# EAGLE board IOB-LED-Monitor_array (EAGLE 7.7.0), part 1 of 2
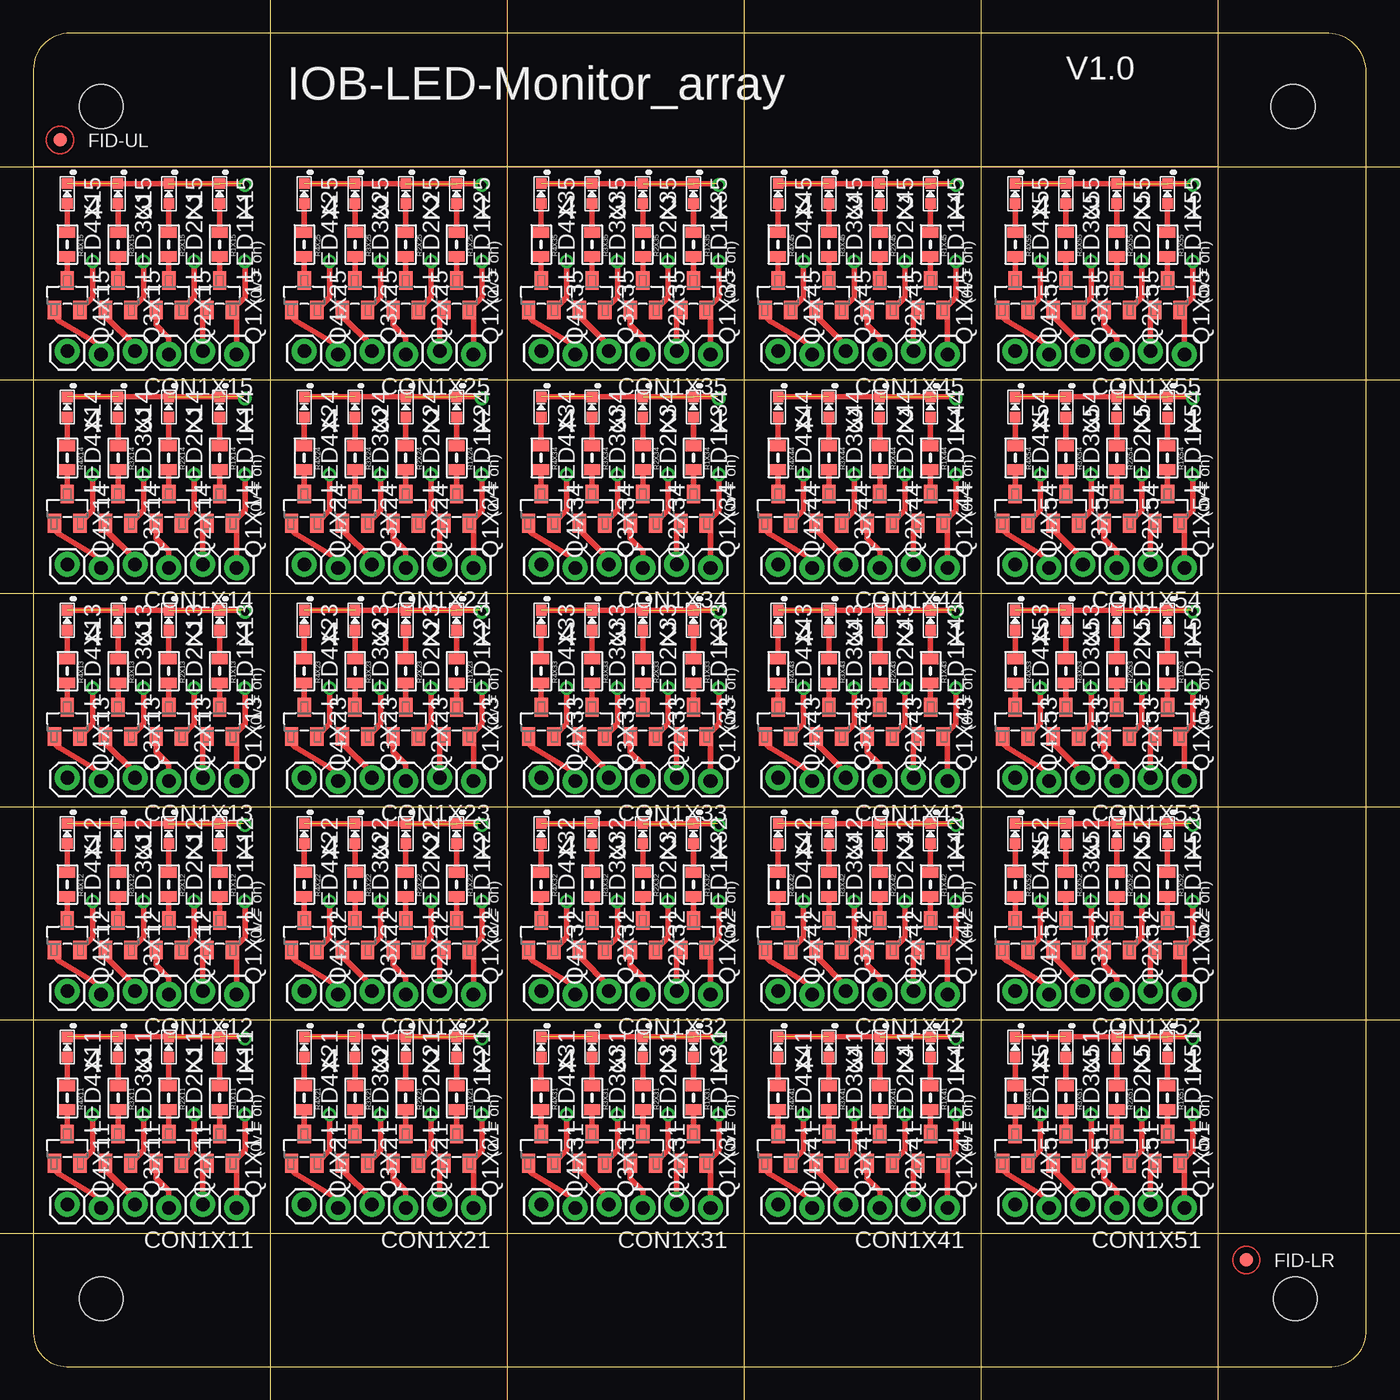
[diagram p0: board, top side]
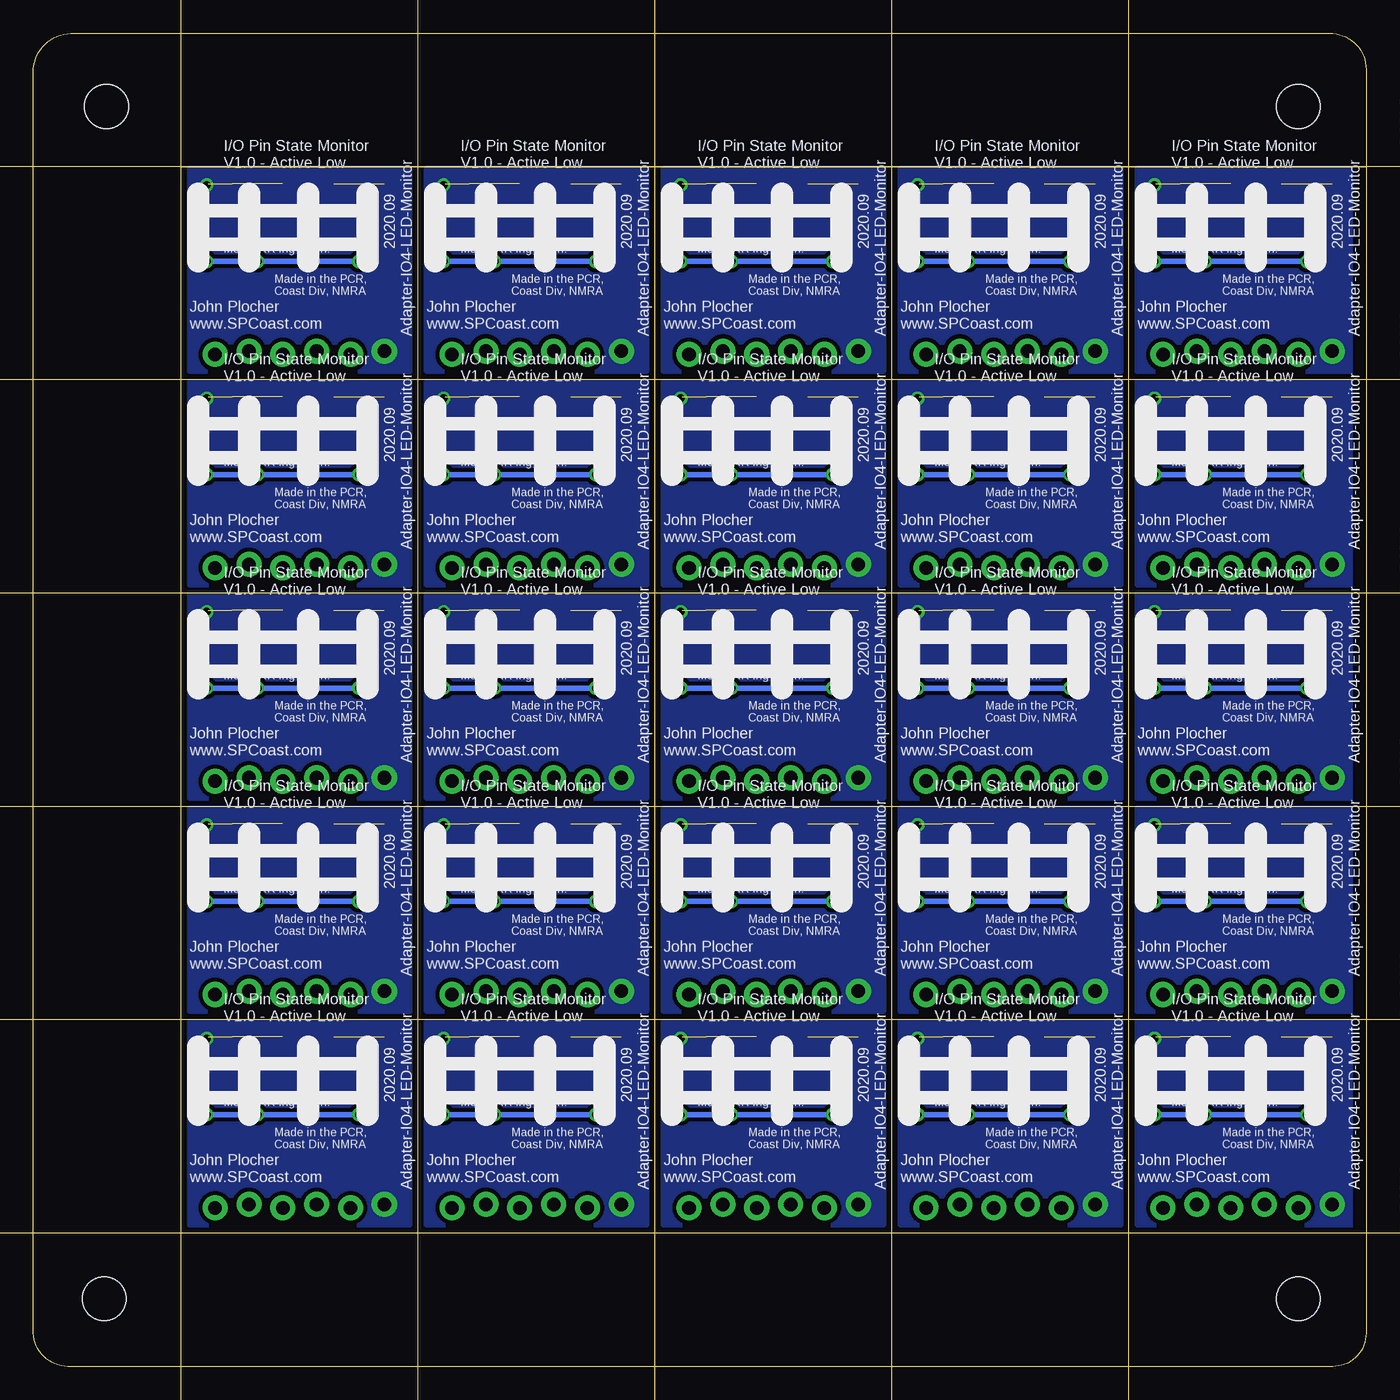
[diagram p1: board, bottom side, seen from below]

Size 100.01 x 100 mm. Coordinates in mm from the lower left corner, seen from the top.
Copper layers (1*16): Top 0.035mm / dielectric 1.5mm / Bottom 0.035mm
Design rules "default": minimum track width 10mil, minimum drill 0.6mm, track to track 8mil, track to pad 8mil, pad to pad 8mil, via to via 8mil, smd to smd 8mil, copper to edge 40mil, drill to drill 8mil, minimum pad ring 10mil, minimum via ring 8mil, stop-mask expansion 4mil, vias tented up to drill 0mil, thermal gap 10mil
Milling: 14 lines

## Footprints (pad centres in the part's own frame; a part is rotated, then mirrored left to right if it is on the bottom)
1X06_LOCK = drill 1.016 pad 1.88: 1 0,0; 2 2.54,-0.254; 3 5.08,0; 4 7.62,-0.254; 5 10.16,0; 6 12.7,-0.254
FIDUCIAL_1MM = smd 1 x 1: 1 0,0
0603-LED = smd 0.8 x 0.8: A 0.75,0; C -0.75,0
SOT23 = smd 1.4 x 1: 1 1.1,-0.95; 2 1.1,0.95; 3 -1.1,0
0805-RES = smd 0.8 x 1.2: 1 -0.9,0; 2 0.9,0
BOARD-SEEED10X10 = hole 3.3: 94.676,5.08; 5.08,94.5; 94.5,94.5; 5.08,5.08

## Placement (x,y rotation side)
CON1X11  [1X06_LOCK]  15.25,11.91 180 top
CON1X12  [1X06_LOCK]  15.25,27.91 180 top
CON1X13  [1X06_LOCK]  15.25,43.91 180 top
CON1X14  [1X06_LOCK]  15.25,59.91 180 top
CON1X15  [1X06_LOCK]  15.25,75.92 180 top
CON1X21  [1X06_LOCK]  33.03,11.91 180 top
CON1X22  [1X06_LOCK]  33.03,27.91 180 top
CON1X23  [1X06_LOCK]  33.03,43.91 180 top
CON1X24  [1X06_LOCK]  33.03,59.91 180 top
CON1X25  [1X06_LOCK]  33.03,75.92 180 top
CON1X31  [1X06_LOCK]  50.81,11.91 180 top
CON1X32  [1X06_LOCK]  50.81,27.91 180 top
CON1X33  [1X06_LOCK]  50.81,43.91 180 top
CON1X34  [1X06_LOCK]  50.81,59.91 180 top
CON1X35  [1X06_LOCK]  50.81,75.92 180 top
CON1X41  [1X06_LOCK]  68.59,11.91 180 top
CON1X42  [1X06_LOCK]  68.59,27.91 180 top
CON1X43  [1X06_LOCK]  68.59,43.91 180 top
CON1X44  [1X06_LOCK]  68.59,59.91 180 top
CON1X45  [1X06_LOCK]  68.59,75.92 180 top
CON1X51  [1X06_LOCK]  86.37,11.91 180 top
CON1X52  [1X06_LOCK]  86.37,27.91 180 top
CON1X53  [1X06_LOCK]  86.37,43.91 180 top
CON1X54  [1X06_LOCK]  86.37,59.91 180 top
CON1X55  [1X06_LOCK]  86.37,75.92 180 top
FID-LR  [FIDUCIAL_1MM]  91.01,8 0 top
FID-UL  [FIDUCIAL_1MM]  2.01,92 0 top
LED1X11  Y  [0603-LED]  13.98,23.97 270 top
LED1X12  Y  [0603-LED]  13.98,39.98 270 top
LED1X13  Y  [0603-LED]  13.98,55.98 270 top
LED1X14  Y  [0603-LED]  13.98,71.98 270 top
LED1X15  Y  [0603-LED]  13.98,87.98 270 top
LED1X21  Y  [0603-LED]  31.76,23.97 270 top
LED1X22  Y  [0603-LED]  31.76,39.98 270 top
LED1X23  Y  [0603-LED]  31.76,55.98 270 top
LED1X24  Y  [0603-LED]  31.76,71.98 270 top
LED1X25  Y  [0603-LED]  31.76,87.98 270 top
LED1X31  Y  [0603-LED]  49.54,23.97 270 top
LED1X32  Y  [0603-LED]  49.54,39.98 270 top
LED1X33  Y  [0603-LED]  49.54,55.98 270 top
LED1X34  Y  [0603-LED]  49.54,71.98 270 top
LED1X35  Y  [0603-LED]  49.54,87.98 270 top
LED1X41  Y  [0603-LED]  67.32,23.97 270 top
LED1X42  Y  [0603-LED]  67.32,39.98 270 top
LED1X43  Y  [0603-LED]  67.32,55.98 270 top
LED1X44  Y  [0603-LED]  67.32,71.98 270 top
LED1X45  Y  [0603-LED]  67.32,87.98 270 top
LED1X51  Y  [0603-LED]  85.1,23.97 270 top
LED1X52  Y  [0603-LED]  85.1,39.98 270 top
LED1X53  Y  [0603-LED]  85.1,55.98 270 top
LED1X54  Y  [0603-LED]  85.1,71.98 270 top
LED1X55  Y  [0603-LED]  85.1,87.98 270 top
LED2X11  Y  [0603-LED]  10.17,23.97 270 top
LED2X12  Y  [0603-LED]  10.17,39.98 270 top
LED2X13  Y  [0603-LED]  10.17,55.98 270 top
LED2X14  Y  [0603-LED]  10.17,71.98 270 top
LED2X15  Y  [0603-LED]  10.17,87.98 270 top
LED2X21  Y  [0603-LED]  27.95,23.97 270 top
LED2X22  Y  [0603-LED]  27.95,39.98 270 top
LED2X23  Y  [0603-LED]  27.95,55.98 270 top
LED2X24  Y  [0603-LED]  27.95,71.98 270 top
LED2X25  Y  [0603-LED]  27.95,87.98 270 top
LED2X31  Y  [0603-LED]  45.73,23.97 270 top
LED2X32  Y  [0603-LED]  45.73,39.98 270 top
LED2X33  Y  [0603-LED]  45.73,55.98 270 top
LED2X34  Y  [0603-LED]  45.73,71.98 270 top
LED2X35  Y  [0603-LED]  45.73,87.98 270 top
LED2X41  Y  [0603-LED]  63.51,23.97 270 top
LED2X42  Y  [0603-LED]  63.51,39.98 270 top
LED2X43  Y  [0603-LED]  63.51,55.98 270 top
LED2X44  Y  [0603-LED]  63.51,71.98 270 top
LED2X45  Y  [0603-LED]  63.51,87.98 270 top
LED2X51  Y  [0603-LED]  81.29,23.97 270 top
LED2X52  Y  [0603-LED]  81.29,39.98 270 top
LED2X53  Y  [0603-LED]  81.29,55.98 270 top
LED2X54  Y  [0603-LED]  81.29,71.98 270 top
LED2X55  Y  [0603-LED]  81.29,87.98 270 top
LED3X11  Y  [0603-LED]  6.36,23.97 270 top
LED3X12  Y  [0603-LED]  6.36,39.98 270 top
LED3X13  Y  [0603-LED]  6.36,55.98 270 top
LED3X14  Y  [0603-LED]  6.36,71.98 270 top
LED3X15  Y  [0603-LED]  6.36,87.98 270 top
LED3X21  Y  [0603-LED]  24.14,23.97 270 top
LED3X22  Y  [0603-LED]  24.14,39.98 270 top
LED3X23  Y  [0603-LED]  24.14,55.98 270 top
LED3X24  Y  [0603-LED]  24.14,71.98 270 top
LED3X25  Y  [0603-LED]  24.14,87.98 270 top
LED3X31  Y  [0603-LED]  41.92,23.97 270 top
LED3X32  Y  [0603-LED]  41.92,39.98 270 top
LED3X33  Y  [0603-LED]  41.92,55.98 270 top
LED3X34  Y  [0603-LED]  41.92,71.98 270 top
LED3X35  Y  [0603-LED]  41.92,87.98 270 top
LED3X41  Y  [0603-LED]  59.7,23.97 270 top
LED3X42  Y  [0603-LED]  59.7,39.98 270 top
LED3X43  Y  [0603-LED]  59.7,55.98 270 top
LED3X44  Y  [0603-LED]  59.7,71.98 270 top
LED3X45  Y  [0603-LED]  59.7,87.98 270 top
LED3X51  Y  [0603-LED]  77.48,23.97 270 top
LED3X52  Y  [0603-LED]  77.48,39.98 270 top
LED3X53  Y  [0603-LED]  77.48,55.98 270 top
LED3X54  Y  [0603-LED]  77.48,71.98 270 top
LED3X55  Y  [0603-LED]  77.48,87.98 270 top
LED4X11  Y  [0603-LED]  2.55,23.97 270 top
LED4X12  Y  [0603-LED]  2.55,39.98 270 top
LED4X13  Y  [0603-LED]  2.55,55.98 270 top
LED4X14  Y  [0603-LED]  2.55,71.98 270 top
LED4X15  Y  [0603-LED]  2.55,87.98 270 top
LED4X21  Y  [0603-LED]  20.33,23.97 270 top
LED4X22  Y  [0603-LED]  20.33,39.98 270 top
LED4X23  Y  [0603-LED]  20.33,55.98 270 top
LED4X24  Y  [0603-LED]  20.33,71.98 270 top
LED4X25  Y  [0603-LED]  20.33,87.98 270 top
LED4X31  Y  [0603-LED]  38.11,23.97 270 top
LED4X32  Y  [0603-LED]  38.11,39.98 270 top
LED4X33  Y  [0603-LED]  38.11,55.98 270 top
LED4X34  Y  [0603-LED]  38.11,71.98 270 top
LED4X35  Y  [0603-LED]  38.11,87.98 270 top
LED4X41  Y  [0603-LED]  55.89,23.97 270 top
LED4X42  Y  [0603-LED]  55.89,39.98 270 top
LED4X43  Y  [0603-LED]  55.89,55.98 270 top
LED4X44  Y  [0603-LED]  55.89,71.98 270 top
LED4X45  Y  [0603-LED]  55.89,87.98 270 top
LED4X51  Y  [0603-LED]  73.67,23.97 270 top
LED4X52  Y  [0603-LED]  73.67,39.98 270 top
LED4X53  Y  [0603-LED]  73.67,55.98 270 top
LED4X54  Y  [0603-LED]  73.67,71.98 270 top
LED4X55  Y  [0603-LED]  73.67,87.98 270 top
Q1X11  P-FET  [SOT23]  13.98,16.35 270 top
Q1X12  P-FET  [SOT23]  13.98,32.36 270 top
Q1X13  P-FET  [SOT23]  13.98,48.36 270 top
Q1X14  P-FET  [SOT23]  13.98,64.36 270 top
Q1X15  P-FET  [SOT23]  13.98,80.36 270 top
Q1X21  P-FET  [SOT23]  31.76,16.35 270 top
Q1X22  P-FET  [SOT23]  31.76,32.36 270 top
Q1X23  P-FET  [SOT23]  31.76,48.36 270 top
Q1X24  P-FET  [SOT23]  31.76,64.36 270 top
Q1X25  P-FET  [SOT23]  31.76,80.36 270 top
Q1X31  P-FET  [SOT23]  49.54,16.35 270 top
Q1X32  P-FET  [SOT23]  49.54,32.36 270 top
Q1X33  P-FET  [SOT23]  49.54,48.36 270 top
Q1X34  P-FET  [SOT23]  49.54,64.36 270 top
Q1X35  P-FET  [SOT23]  49.54,80.36 270 top
Q1X41  P-FET  [SOT23]  67.32,16.35 270 top
Q1X42  P-FET  [SOT23]  67.32,32.36 270 top
Q1X43  P-FET  [SOT23]  67.32,48.36 270 top
Q1X44  P-FET  [SOT23]  67.32,64.36 270 top
Q1X45  P-FET  [SOT23]  67.32,80.36 270 top
Q1X51  P-FET  [SOT23]  85.1,16.35 270 top
Q1X52  P-FET  [SOT23]  85.1,32.36 270 top
Q1X53  P-FET  [SOT23]  85.1,48.36 270 top
Q1X54  P-FET  [SOT23]  85.1,64.36 270 top
Q1X55  P-FET  [SOT23]  85.1,80.36 270 top
Q2X11  P-FET  [SOT23]  10.17,16.35 270 top
Q2X12  P-FET  [SOT23]  10.17,32.36 270 top
Q2X13  P-FET  [SOT23]  10.17,48.36 270 top
Q2X14  P-FET  [SOT23]  10.17,64.36 270 top
Q2X15  P-FET  [SOT23]  10.17,80.36 270 top
Q2X21  P-FET  [SOT23]  27.95,16.35 270 top
Q2X22  P-FET  [SOT23]  27.95,32.36 270 top
Q2X23  P-FET  [SOT23]  27.95,48.36 270 top
Q2X24  P-FET  [SOT23]  27.95,64.36 270 top
Q2X25  P-FET  [SOT23]  27.95,80.36 270 top
Q2X31  P-FET  [SOT23]  45.73,16.35 270 top
Q2X32  P-FET  [SOT23]  45.73,32.36 270 top
Q2X33  P-FET  [SOT23]  45.73,48.36 270 top
Q2X34  P-FET  [SOT23]  45.73,64.36 270 top
Q2X35  P-FET  [SOT23]  45.73,80.36 270 top
Q2X41  P-FET  [SOT23]  63.51,16.35 270 top
Q2X42  P-FET  [SOT23]  63.51,32.36 270 top
Q2X43  P-FET  [SOT23]  63.51,48.36 270 top
Q2X44  P-FET  [SOT23]  63.51,64.36 270 top
Q2X45  P-FET  [SOT23]  63.51,80.36 270 top
Q2X51  P-FET  [SOT23]  81.29,16.35 270 top
Q2X52  P-FET  [SOT23]  81.29,32.36 270 top
Q2X53  P-FET  [SOT23]  81.29,48.36 270 top
Q2X54  P-FET  [SOT23]  81.29,64.36 270 top
Q2X55  P-FET  [SOT23]  81.29,80.36 270 top
Q3X11  P-FET  [SOT23]  6.36,16.35 270 top
Q3X12  P-FET  [SOT23]  6.36,32.36 270 top
Q3X13  P-FET  [SOT23]  6.36,48.36 270 top
Q3X14  P-FET  [SOT23]  6.36,64.36 270 top
Q3X15  P-FET  [SOT23]  6.36,80.36 270 top
Q3X21  P-FET  [SOT23]  24.14,16.35 270 top
Q3X22  P-FET  [SOT23]  24.14,32.36 270 top
Q3X23  P-FET  [SOT23]  24.14,48.36 270 top
Q3X24  P-FET  [SOT23]  24.14,64.36 270 top
Q3X25  P-FET  [SOT23]  24.14,80.36 270 top
Q3X31  P-FET  [SOT23]  41.92,16.35 270 top
Q3X32  P-FET  [SOT23]  41.92,32.36 270 top
Q3X33  P-FET  [SOT23]  41.92,48.36 270 top
Q3X34  P-FET  [SOT23]  41.92,64.36 270 top
Q3X35  P-FET  [SOT23]  41.92,80.36 270 top
Q3X41  P-FET  [SOT23]  59.7,16.35 270 top
Q3X42  P-FET  [SOT23]  59.7,32.36 270 top
Q3X43  P-FET  [SOT23]  59.7,48.36 270 top
Q3X44  P-FET  [SOT23]  59.7,64.36 270 top
Q3X45  P-FET  [SOT23]  59.7,80.36 270 top
Q3X51  P-FET  [SOT23]  77.48,16.35 270 top
Q3X52  P-FET  [SOT23]  77.48,32.36 270 top
Q3X53  P-FET  [SOT23]  77.48,48.36 270 top
Q3X54  P-FET  [SOT23]  77.48,64.36 270 top
Q3X55  P-FET  [SOT23]  77.48,80.36 270 top
Q4X11  P-FET  [SOT23]  2.55,16.35 270 top
Q4X12  P-FET  [SOT23]  2.55,32.36 270 top
Q4X13  P-FET  [SOT23]  2.55,48.36 270 top
Q4X14  P-FET  [SOT23]  2.55,64.36 270 top
Q4X15  P-FET  [SOT23]  2.55,80.36 270 top
Q4X21  P-FET  [SOT23]  20.33,16.35 270 top
Q4X22  P-FET  [SOT23]  20.33,32.36 270 top
Q4X23  P-FET  [SOT23]  20.33,48.36 270 top
Q4X24  P-FET  [SOT23]  20.33,64.36 270 top
Q4X25  P-FET  [SOT23]  20.33,80.36 270 top
Q4X31  P-FET  [SOT23]  38.11,16.35 270 top
Q4X32  P-FET  [SOT23]  38.11,32.36 270 top
Q4X33  P-FET  [SOT23]  38.11,48.36 270 top
Q4X34  P-FET  [SOT23]  38.11,64.36 270 top
Q4X35  P-FET  [SOT23]  38.11,80.36 270 top
Q4X41  P-FET  [SOT23]  55.89,16.35 270 top
Q4X42  P-FET  [SOT23]  55.89,32.36 270 top
Q4X43  P-FET  [SOT23]  55.89,48.36 270 top
Q4X44  P-FET  [SOT23]  55.89,64.36 270 top
Q4X45  P-FET  [SOT23]  55.89,80.36 270 top
Q4X51  P-FET  [SOT23]  73.67,16.35 270 top
Q4X52  P-FET  [SOT23]  73.67,32.36 270 top
Q4X53  P-FET  [SOT23]  73.67,48.36 270 top
Q4X54  P-FET  [SOT23]  73.67,64.36 270 top
Q4X55  P-FET  [SOT23]  73.67,80.36 270 top
R1X11  2K0  [0805-RES]  13.98,20.16 270 top
R1X12  2K0  [0805-RES]  13.98,36.17 270 top
R1X13  2K0  [0805-RES]  13.98,52.17 270 top
R1X14  2K0  [0805-RES]  13.98,68.17 270 top
R1X15  2K0  [0805-RES]  13.98,84.17 270 top
R1X21  2K0  [0805-RES]  31.76,20.16 270 top
R1X22  2K0  [0805-RES]  31.76,36.17 270 top
R1X23  2K0  [0805-RES]  31.76,52.17 270 top
R1X24  2K0  [0805-RES]  31.76,68.17 270 top
R1X25  2K0  [0805-RES]  31.76,84.17 270 top
R1X31  2K0  [0805-RES]  49.54,20.16 270 top
R1X32  2K0  [0805-RES]  49.54,36.17 270 top
R1X33  2K0  [0805-RES]  49.54,52.17 270 top
R1X34  2K0  [0805-RES]  49.54,68.17 270 top
R1X35  2K0  [0805-RES]  49.54,84.17 270 top
R1X41  2K0  [0805-RES]  67.32,20.16 270 top
R1X42  2K0  [0805-RES]  67.32,36.17 270 top
R1X43  2K0  [0805-RES]  67.32,52.17 270 top
R1X44  2K0  [0805-RES]  67.32,68.17 270 top
R1X45  2K0  [0805-RES]  67.32,84.17 270 top
R1X51  2K0  [0805-RES]  85.1,20.16 270 top
R1X52  2K0  [0805-RES]  85.1,36.17 270 top
R1X53  2K0  [0805-RES]  85.1,52.17 270 top
R1X54  2K0  [0805-RES]  85.1,68.17 270 top
R1X55  2K0  [0805-RES]  85.1,84.17 270 top
R2X11  2K0  [0805-RES]  10.17,20.16 270 top
R2X12  2K0  [0805-RES]  10.17,36.17 270 top
R2X13  2K0  [0805-RES]  10.17,52.17 270 top
R2X14  2K0  [0805-RES]  10.17,68.17 270 top
R2X15  2K0  [0805-RES]  10.17,84.17 270 top
R2X21  2K0  [0805-RES]  27.95,20.16 270 top
R2X22  2K0  [0805-RES]  27.95,36.17 270 top
R2X23  2K0  [0805-RES]  27.95,52.17 270 top
R2X24  2K0  [0805-RES]  27.95,68.17 270 top
R2X25  2K0  [0805-RES]  27.95,84.17 270 top
R2X31  2K0  [0805-RES]  45.73,20.16 270 top
R2X32  2K0  [0805-RES]  45.73,36.17 270 top
R2X33  2K0  [0805-RES]  45.73,52.17 270 top
R2X34  2K0  [0805-RES]  45.73,68.17 270 top
R2X35  2K0  [0805-RES]  45.73,84.17 270 top
R2X41  2K0  [0805-RES]  63.51,20.16 270 top
R2X42  2K0  [0805-RES]  63.51,36.17 270 top
R2X43  2K0  [0805-RES]  63.51,52.17 270 top
R2X44  2K0  [0805-RES]  63.51,68.17 270 top
R2X45  2K0  [0805-RES]  63.51,84.17 270 top
R2X51  2K0  [0805-RES]  81.29,20.16 270 top
R2X52  2K0  [0805-RES]  81.29,36.17 270 top
R2X53  2K0  [0805-RES]  81.29,52.17 270 top
R2X54  2K0  [0805-RES]  81.29,68.17 270 top
R2X55  2K0  [0805-RES]  81.29,84.17 270 top
R3X11  2K0  [0805-RES]  6.36,20.16 270 top
R3X12  2K0  [0805-RES]  6.36,36.17 270 top
R3X13  2K0  [0805-RES]  6.36,52.17 270 top
R3X14  2K0  [0805-RES]  6.36,68.17 270 top
R3X15  2K0  [0805-RES]  6.36,84.17 270 top
R3X21  2K0  [0805-RES]  24.14,20.16 270 top
R3X22  2K0  [0805-RES]  24.14,36.17 270 top
R3X23  2K0  [0805-RES]  24.14,52.17 270 top
R3X24  2K0  [0805-RES]  24.14,68.17 270 top
R3X25  2K0  [0805-RES]  24.14,84.17 270 top
R3X31  2K0  [0805-RES]  41.92,20.16 270 top
R3X32  2K0  [0805-RES]  41.92,36.17 270 top
R3X33  2K0  [0805-RES]  41.92,52.17 270 top
R3X34  2K0  [0805-RES]  41.92,68.17 270 top
R3X35  2K0  [0805-RES]  41.92,84.17 270 top
R3X41  2K0  [0805-RES]  59.7,20.16 270 top
R3X42  2K0  [0805-RES]  59.7,36.17 270 top
R3X43  2K0  [0805-RES]  59.7,52.17 270 top
R3X44  2K0  [0805-RES]  59.7,68.17 270 top
R3X45  2K0  [0805-RES]  59.7,84.17 270 top
R3X51  2K0  [0805-RES]  77.48,20.16 270 top
R3X52  2K0  [0805-RES]  77.48,36.17 270 top
R3X53  2K0  [0805-RES]  77.48,52.17 270 top
R3X54  2K0  [0805-RES]  77.48,68.17 270 top
R3X55  2K0  [0805-RES]  77.48,84.17 270 top
R4X1  [BOARD-SEEED10X10]  0.01,0 0 top
R4X11  2K0  [0805-RES]  2.55,20.16 270 top
R4X12  2K0  [0805-RES]  2.55,36.17 270 top
R4X13  2K0  [0805-RES]  2.55,52.17 270 top
R4X14  2K0  [0805-RES]  2.55,68.17 270 top
R4X15  2K0  [0805-RES]  2.55,84.17 270 top
R4X21  2K0  [0805-RES]  20.33,20.16 270 top
R4X22  2K0  [0805-RES]  20.33,36.17 270 top
R4X23  2K0  [0805-RES]  20.33,52.17 270 top
R4X24  2K0  [0805-RES]  20.33,68.17 270 top
R4X25  2K0  [0805-RES]  20.33,84.17 270 top
R4X31  2K0  [0805-RES]  38.11,20.16 270 top
R4X32  2K0  [0805-RES]  38.11,36.17 270 top
R4X33  2K0  [0805-RES]  38.11,52.17 270 top
R4X34  2K0  [0805-RES]  38.11,68.17 270 top
R4X35  2K0  [0805-RES]  38.11,84.17 270 top
R4X41  2K0  [0805-RES]  55.89,20.16 270 top
R4X42  2K0  [0805-RES]  55.89,36.17 270 top
R4X43  2K0  [0805-RES]  55.89,52.17 270 top
R4X44  2K0  [0805-RES]  55.89,68.17 270 top
R4X45  2K0  [0805-RES]  55.89,84.17 270 top
R4X51  2K0  [0805-RES]  73.67,20.16 270 top
R4X52  2K0  [0805-RES]  73.67,36.17 270 top
R4X53  2K0  [0805-RES]  73.67,52.17 270 top
R4X54  2K0  [0805-RES]  73.67,68.17 270 top
R4X55  2K0  [0805-RES]  73.67,84.17 270 top

## Library data of the parts
CON1X11-CON1X15 CON1X21-CON1X25 CON1X31-CON1X35 CON1X41-CON1X45 CON1X51-CON1X55 FID-LR FID-UL LED1X11-LED1X15 LED1X21-LED1X25 LED1X31-LED1X35 LED1X41-LED1X45 LED1X51-LED1X55 LED2X11-LED2X15 LED2X21-LED2X25 LED2X31-LED2X35 LED2X41-LED2X45 LED2X51-LED2X55 LED3X11-LED3X15 LED3X21-LED3X25 LED3X31-LED3X35 LED3X41-LED3X45 LED3X51-LED3X55 LED4X11-LED4X15 LED4X21-LED4X25 LED4X31-LED4X35 LED4X41-LED4X45 LED4X51-LED4X55 Q1X11-Q1X15 Q1X21-Q1X25 Q1X31-Q1X35 Q1X41-Q1X45 Q1X51-Q1X55 Q2X11-Q2X15 Q2X21-Q2X25 Q2X31-Q2X35 Q2X41-Q2X45 Q2X51-Q2X55 Q3X11-Q3X15 Q3X21-Q3X25 Q3X31-Q3X35 Q3X41-Q3X45 Q3X51-Q3X55 Q4X11-Q4X15 Q4X21-Q4X25 Q4X31-Q4X35 Q4X41-Q4X45 Q4X51-Q4X55 R1X11-R1X15 R1X21-R1X25 R1X31-R1X35 R1X41-R1X45 R1X51-R1X55 R2X11-R2X15 R2X21-R2X25 R2X31-R2X35 R2X41-R2X45 R2X51-R2X55 R3X11-R3X15 R3X21-R3X25 R3X31-R3X35 R3X41-R3X45 R3X51-R3X55 R4X1 R4X11-R4X15 R4X21-R4X25 R4X31-R4X35 R4X41-R4X45 R4X51-R4X55 = SPCoast

## Nets
GNDX11: CON1X11.6 LED1X11.C LED2X11.C LED3X11.C LED4X11.C
GNDX12: CON1X12.6 LED1X12.C LED2X12.C LED3X12.C LED4X12.C
GNDX13: CON1X13.6 LED1X13.C LED2X13.C LED3X13.C LED4X13.C
GNDX14: CON1X14.6 LED1X14.C LED2X14.C LED3X14.C LED4X14.C
GNDX15: CON1X15.6 LED1X15.C LED2X15.C LED3X15.C LED4X15.C
GNDX21: CON1X21.6 LED1X21.C LED2X21.C LED3X21.C LED4X21.C
GNDX22: CON1X22.6 LED1X22.C LED2X22.C LED3X22.C LED4X22.C
GNDX23: CON1X23.6 LED1X23.C LED2X23.C LED3X23.C LED4X23.C
GNDX24: CON1X24.6 LED1X24.C LED2X24.C LED3X24.C LED4X24.C
GNDX25: CON1X25.6 LED1X25.C LED2X25.C LED3X25.C LED4X25.C
GNDX31: CON1X31.6 LED1X31.C LED2X31.C LED3X31.C LED4X31.C
GNDX32: CON1X32.6 LED1X32.C LED2X32.C LED3X32.C LED4X32.C
GNDX33: CON1X33.6 LED1X33.C LED2X33.C LED3X33.C LED4X33.C
GNDX34: CON1X34.6 LED1X34.C LED2X34.C LED3X34.C LED4X34.C
GNDX35: CON1X35.6 LED1X35.C LED2X35.C LED3X35.C LED4X35.C
GNDX41: CON1X41.6 LED1X41.C LED2X41.C LED3X41.C LED4X41.C
GNDX42: CON1X42.6 LED1X42.C LED2X42.C LED3X42.C LED4X42.C
GNDX43: CON1X43.6 LED1X43.C LED2X43.C LED3X43.C LED4X43.C
GNDX44: CON1X44.6 LED1X44.C LED2X44.C LED3X44.C LED4X44.C
GNDX45: CON1X45.6 LED1X45.C LED2X45.C LED3X45.C LED4X45.C
GNDX51: CON1X51.6 LED1X51.C LED2X51.C LED3X51.C LED4X51.C
GNDX52: CON1X52.6 LED1X52.C LED2X52.C LED3X52.C LED4X52.C
GNDX53: CON1X53.6 LED1X53.C LED2X53.C LED3X53.C LED4X53.C
GNDX54: CON1X54.6 LED1X54.C LED2X54.C LED3X54.C LED4X54.C
GNDX55: CON1X55.6 LED1X55.C LED2X55.C LED3X55.C LED4X55.C
N$44X11: Q1X11.3 R1X11.2
N$44X12: Q1X12.3 R1X12.2
N$44X13: Q1X13.3 R1X13.2
N$44X14: Q1X14.3 R1X14.2
N$44X15: Q1X15.3 R1X15.2
N$44X21: Q1X21.3 R1X21.2
N$44X22: Q1X22.3 R1X22.2
N$44X23: Q1X23.3 R1X23.2
N$44X24: Q1X24.3 R1X24.2
N$44X25: Q1X25.3 R1X25.2
N$44X31: Q1X31.3 R1X31.2
N$44X32: Q1X32.3 R1X32.2
N$44X33: Q1X33.3 R1X33.2
N$44X34: Q1X34.3 R1X34.2
N$44X35: Q1X35.3 R1X35.2
N$44X41: Q1X41.3 R1X41.2
N$44X42: Q1X42.3 R1X42.2
N$44X43: Q1X43.3 R1X43.2
N$44X44: Q1X44.3 R1X44.2
N$44X45: Q1X45.3 R1X45.2
N$44X51: Q1X51.3 R1X51.2
N$44X52: Q1X52.3 R1X52.2
N$44X53: Q1X53.3 R1X53.2
N$44X54: Q1X54.3 R1X54.2
N$44X55: Q1X55.3 R1X55.2
N$45X11: Q2X11.3 R2X11.2
N$45X12: Q2X12.3 R2X12.2
N$45X13: Q2X13.3 R2X13.2
N$45X14: Q2X14.3 R2X14.2
N$45X15: Q2X15.3 R2X15.2
N$45X21: Q2X21.3 R2X21.2
N$45X22: Q2X22.3 R2X22.2
N$45X23: Q2X23.3 R2X23.2
N$45X24: Q2X24.3 R2X24.2
N$45X25: Q2X25.3 R2X25.2
N$45X31: Q2X31.3 R2X31.2
N$45X32: Q2X32.3 R2X32.2
N$45X33: Q2X33.3 R2X33.2
N$45X34: Q2X34.3 R2X34.2
N$45X35: Q2X35.3 R2X35.2
N$45X41: Q2X41.3 R2X41.2
N$45X42: Q2X42.3 R2X42.2
N$45X43: Q2X43.3 R2X43.2
N$45X44: Q2X44.3 R2X44.2
N$45X45: Q2X45.3 R2X45.2
N$45X51: Q2X51.3 R2X51.2
N$45X52: Q2X52.3 R2X52.2
N$45X53: Q2X53.3 R2X53.2
N$45X54: Q2X54.3 R2X54.2
N$45X55: Q2X55.3 R2X55.2
N$46X11: Q3X11.3 R3X11.2
N$46X12: Q3X12.3 R3X12.2
N$46X13: Q3X13.3 R3X13.2
N$46X14: Q3X14.3 R3X14.2
N$46X15: Q3X15.3 R3X15.2
N$46X21: Q3X21.3 R3X21.2
N$46X22: Q3X22.3 R3X22.2
N$46X23: Q3X23.3 R3X23.2
N$46X24: Q3X24.3 R3X24.2
N$46X25: Q3X25.3 R3X25.2
N$46X31: Q3X31.3 R3X31.2
N$46X32: Q3X32.3 R3X32.2
N$46X33: Q3X33.3 R3X33.2
N$46X34: Q3X34.3 R3X34.2
N$46X35: Q3X35.3 R3X35.2
N$46X41: Q3X41.3 R3X41.2
N$46X42: Q3X42.3 R3X42.2
N$46X43: Q3X43.3 R3X43.2
N$46X44: Q3X44.3 R3X44.2
N$46X45: Q3X45.3 R3X45.2
N$46X51: Q3X51.3 R3X51.2
N$46X52: Q3X52.3 R3X52.2
N$46X53: Q3X53.3 R3X53.2
N$46X54: Q3X54.3 R3X54.2
N$46X55: Q3X55.3 R3X55.2
N$47X11: Q4X11.3 R4X11.2
N$47X12: Q4X12.3 R4X12.2
N$47X13: Q4X13.3 R4X13.2
N$47X14: Q4X14.3 R4X14.2
N$47X15: Q4X15.3 R4X15.2
N$47X21: Q4X21.3 R4X21.2
N$47X22: Q4X22.3 R4X22.2
N$47X23: Q4X23.3 R4X23.2
N$47X24: Q4X24.3 R4X24.2
N$47X25: Q4X25.3 R4X25.2
N$47X31: Q4X31.3 R4X31.2
N$47X32: Q4X32.3 R4X32.2
N$47X33: Q4X33.3 R4X33.2
N$47X34: Q4X34.3 R4X34.2
N$47X35: Q4X35.3 R4X35.2
N$47X41: Q4X41.3 R4X41.2
N$47X42: Q4X42.3 R4X42.2
N$47X43: Q4X43.3 R4X43.2
N$47X44: Q4X44.3 R4X44.2
N$47X45: Q4X45.3 R4X45.2
N$47X51: Q4X51.3 R4X51.2
N$47X52: Q4X52.3 R4X52.2
N$47X53: Q4X53.3 R4X53.2
N$47X54: Q4X54.3 R4X54.2
N$47X55: Q4X55.3 R4X55.2
N$48X11: LED1X11.A R1X11.1
N$48X12: LED1X12.A R1X12.1
N$48X13: LED1X13.A R1X13.1
N$48X14: LED1X14.A R1X14.1
N$48X15: LED1X15.A R1X15.1
N$48X21: LED1X21.A R1X21.1
N$48X22: LED1X22.A R1X22.1
N$48X23: LED1X23.A R1X23.1
N$48X24: LED1X24.A R1X24.1
N$48X25: LED1X25.A R1X25.1
N$48X31: LED1X31.A R1X31.1
N$48X32: LED1X32.A R1X32.1
N$48X33: LED1X33.A R1X33.1
N$48X34: LED1X34.A R1X34.1
N$48X35: LED1X35.A R1X35.1
N$48X41: LED1X41.A R1X41.1
N$48X42: LED1X42.A R1X42.1
N$48X43: LED1X43.A R1X43.1
N$48X44: LED1X44.A R1X44.1
N$48X45: LED1X45.A R1X45.1
N$48X51: LED1X51.A R1X51.1
N$48X52: LED1X52.A R1X52.1
N$48X53: LED1X53.A R1X53.1
N$48X54: LED1X54.A R1X54.1
N$48X55: LED1X55.A R1X55.1
N$49X11: LED2X11.A R2X11.1
N$49X12: LED2X12.A R2X12.1
N$49X13: LED2X13.A R2X13.1
N$49X14: LED2X14.A R2X14.1
N$49X15: LED2X15.A R2X15.1
N$49X21: LED2X21.A R2X21.1
N$49X22: LED2X22.A R2X22.1
N$49X23: LED2X23.A R2X23.1
N$49X24: LED2X24.A R2X24.1
N$49X25: LED2X25.A R2X25.1
N$49X31: LED2X31.A R2X31.1
N$49X32: LED2X32.A R2X32.1
N$49X33: LED2X33.A R2X33.1
N$49X34: LED2X34.A R2X34.1
N$49X35: LED2X35.A R2X35.1
N$49X41: LED2X41.A R2X41.1
N$49X42: LED2X42.A R2X42.1
N$49X43: LED2X43.A R2X43.1
N$49X44: LED2X44.A R2X44.1
N$49X45: LED2X45.A R2X45.1
N$49X51: LED2X51.A R2X51.1
N$49X52: LED2X52.A R2X52.1
N$49X53: LED2X53.A R2X53.1
N$49X54: LED2X54.A R2X54.1
N$49X55: LED2X55.A R2X55.1
N$50X11: LED3X11.A R3X11.1
N$50X12: LED3X12.A R3X12.1
N$50X13: LED3X13.A R3X13.1
N$50X14: LED3X14.A R3X14.1
N$50X15: LED3X15.A R3X15.1
N$50X21: LED3X21.A R3X21.1
N$50X22: LED3X22.A R3X22.1
N$50X23: LED3X23.A R3X23.1
N$50X24: LED3X24.A R3X24.1
N$50X25: LED3X25.A R3X25.1
N$50X31: LED3X31.A R3X31.1
N$50X32: LED3X32.A R3X32.1
N$50X33: LED3X33.A R3X33.1
N$50X34: LED3X34.A R3X34.1
N$50X35: LED3X35.A R3X35.1
N$50X41: LED3X41.A R3X41.1
N$50X42: LED3X42.A R3X42.1
N$50X43: LED3X43.A R3X43.1
N$50X44: LED3X44.A R3X44.1
N$50X45: LED3X45.A R3X45.1
N$50X51: LED3X51.A R3X51.1
N$50X52: LED3X52.A R3X52.1
N$50X53: LED3X53.A R3X53.1
N$50X54: LED3X54.A R3X54.1
N$50X55: LED3X55.A R3X55.1
N$51X11: LED4X11.A R4X11.1
N$51X12: LED4X12.A R4X12.1
N$51X13: LED4X13.A R4X13.1
N$51X14: LED4X14.A R4X14.1
N$51X15: LED4X15.A R4X15.1
N$51X21: LED4X21.A R4X21.1
N$51X22: LED4X22.A R4X22.1
N$51X23: LED4X23.A R4X23.1
N$51X24: LED4X24.A R4X24.1
N$51X25: LED4X25.A R4X25.1
N$51X31: LED4X31.A R4X31.1
N$51X32: LED4X32.A R4X32.1
N$51X33: LED4X33.A R4X33.1
N$51X34: LED4X34.A R4X34.1
N$51X35: LED4X35.A R4X35.1
N$51X41: LED4X41.A R4X41.1
N$51X42: LED4X42.A R4X42.1
N$51X43: LED4X43.A R4X43.1
N$51X44: LED4X44.A R4X44.1
N$51X45: LED4X45.A R4X45.1
N$51X51: LED4X51.A R4X51.1
N$51X52: LED4X52.A R4X52.1
N$51X53: LED4X53.A R4X53.1
N$51X54: LED4X54.A R4X54.1
N$51X55: LED4X55.A R4X55.1
P1X11: CON1X11.2 Q1X11.1
P1X12: CON1X12.2 Q1X12.1
P1X13: CON1X13.2 Q1X13.1
P1X14: CON1X14.2 Q1X14.1
P1X15: CON1X15.2 Q1X15.1
P1X21: CON1X21.2 Q1X21.1
P1X22: CON1X22.2 Q1X22.1
P1X23: CON1X23.2 Q1X23.1
P1X24: CON1X24.2 Q1X24.1
P1X25: CON1X25.2 Q1X25.1
P1X31: CON1X31.2 Q1X31.1
P1X32: CON1X32.2 Q1X32.1
P1X33: CON1X33.2 Q1X33.1
P1X34: CON1X34.2 Q1X34.1
P1X35: CON1X35.2 Q1X35.1
P1X41: CON1X41.2 Q1X41.1
P1X42: CON1X42.2 Q1X42.1
P1X43: CON1X43.2 Q1X43.1
P1X44: CON1X44.2 Q1X44.1
P1X45: CON1X45.2 Q1X45.1
P1X51: CON1X51.2 Q1X51.1
P1X52: CON1X52.2 Q1X52.1
P1X53: CON1X53.2 Q1X53.1
P1X54: CON1X54.2 Q1X54.1
P1X55: CON1X55.2 Q1X55.1
P2X11: CON1X11.3 Q2X11.1
P2X12: CON1X12.3 Q2X12.1
P2X13: CON1X13.3 Q2X13.1
P2X14: CON1X14.3 Q2X14.1
P2X15: CON1X15.3 Q2X15.1
P2X21: CON1X21.3 Q2X21.1
P2X22: CON1X22.3 Q2X22.1
P2X23: CON1X23.3 Q2X23.1
P2X24: CON1X24.3 Q2X24.1
P2X25: CON1X25.3 Q2X25.1
P2X31: CON1X31.3 Q2X31.1
P2X32: CON1X32.3 Q2X32.1
P2X33: CON1X33.3 Q2X33.1
P2X34: CON1X34.3 Q2X34.1
P2X35: CON1X35.3 Q2X35.1
P2X41: CON1X41.3 Q2X41.1
P2X42: CON1X42.3 Q2X42.1
P2X43: CON1X43.3 Q2X43.1
P2X44: CON1X44.3 Q2X44.1
P2X45: CON1X45.3 Q2X45.1
P2X51: CON1X51.3 Q2X51.1
P2X52: CON1X52.3 Q2X52.1
P2X53: CON1X53.3 Q2X53.1
P2X54: CON1X54.3 Q2X54.1
P2X55: CON1X55.3 Q2X55.1
P3X11: CON1X11.4 Q3X11.1
P3X12: CON1X12.4 Q3X12.1
P3X13: CON1X13.4 Q3X13.1
P3X14: CON1X14.4 Q3X14.1
P3X15: CON1X15.4 Q3X15.1
P3X21: CON1X21.4 Q3X21.1
P3X22: CON1X22.4 Q3X22.1
P3X23: CON1X23.4 Q3X23.1
P3X24: CON1X24.4 Q3X24.1
P3X25: CON1X25.4 Q3X25.1
P3X31: CON1X31.4 Q3X31.1
P3X32: CON1X32.4 Q3X32.1
P3X33: CON1X33.4 Q3X33.1
P3X34: CON1X34.4 Q3X34.1
P3X35: CON1X35.4 Q3X35.1
P3X41: CON1X41.4 Q3X41.1
P3X42: CON1X42.4 Q3X42.1
P3X43: CON1X43.4 Q3X43.1
P3X44: CON1X44.4 Q3X44.1
P3X45: CON1X45.4 Q3X45.1
P3X51: CON1X51.4 Q3X51.1
P3X52: CON1X52.4 Q3X52.1
P3X53: CON1X53.4 Q3X53.1
P3X54: CON1X54.4 Q3X54.1
P3X55: CON1X55.4 Q3X55.1
P4X11: CON1X11.5 Q4X11.1
P4X12: CON1X12.5 Q4X12.1
P4X13: CON1X13.5 Q4X13.1
P4X14: CON1X14.5 Q4X14.1
P4X15: CON1X15.5 Q4X15.1
P4X21: CON1X21.5 Q4X21.1
P4X22: CON1X22.5 Q4X22.1
P4X23: CON1X23.5 Q4X23.1
P4X24: CON1X24.5 Q4X24.1
P4X25: CON1X25.5 Q4X25.1
P4X31: CON1X31.5 Q4X31.1
P4X32: CON1X32.5 Q4X32.1
P4X33: CON1X33.5 Q4X33.1
P4X34: CON1X34.5 Q4X34.1
P4X35: CON1X35.5 Q4X35.1
P4X41: CON1X41.5 Q4X41.1
P4X42: CON1X42.5 Q4X42.1
P4X43: CON1X43.5 Q4X43.1
P4X44: CON1X44.5 Q4X44.1
P4X45: CON1X45.5 Q4X45.1
P4X51: CON1X51.5 Q4X51.1
P4X52: CON1X52.5 Q4X52.1
P4X53: CON1X53.5 Q4X53.1
P4X54: CON1X54.5 Q4X54.1
P4X55: CON1X55.5 Q4X55.1
VCCX11: CON1X11.1 Q1X11.2 Q2X11.2 Q3X11.2 Q4X11.2
VCCX12: CON1X12.1 Q1X12.2 Q2X12.2 Q3X12.2 Q4X12.2
VCCX13: CON1X13.1 Q1X13.2 Q2X13.2 Q3X13.2 Q4X13.2
VCCX14: CON1X14.1 Q1X14.2 Q2X14.2 Q3X14.2 Q4X14.2
VCCX15: CON1X15.1 Q1X15.2 Q2X15.2 Q3X15.2 Q4X15.2
VCCX21: CON1X21.1 Q1X21.2 Q2X21.2 Q3X21.2 Q4X21.2
VCCX22: CON1X22.1 Q1X22.2 Q2X22.2 Q3X22.2 Q4X22.2
VCCX23: CON1X23.1 Q1X23.2 Q2X23.2 Q3X23.2 Q4X23.2
VCCX24: CON1X24.1 Q1X24.2 Q2X24.2 Q3X24.2 Q4X24.2
VCCX25: CON1X25.1 Q1X25.2 Q2X25.2 Q3X25.2 Q4X25.2
VCCX31: CON1X31.1 Q1X31.2 Q2X31.2 Q3X31.2 Q4X31.2
VCCX32: CON1X32.1 Q1X32.2 Q2X32.2 Q3X32.2 Q4X32.2
VCCX33: CON1X33.1 Q1X33.2 Q2X33.2 Q3X33.2 Q4X33.2
VCCX34: CON1X34.1 Q1X34.2 Q2X34.2 Q3X34.2 Q4X34.2
VCCX35: CON1X35.1 Q1X35.2 Q2X35.2 Q3X35.2 Q4X35.2
VCCX41: CON1X41.1 Q1X41.2 Q2X41.2 Q3X41.2 Q4X41.2
VCCX42: CON1X42.1 Q1X42.2 Q2X42.2 Q3X42.2 Q4X42.2
VCCX43: CON1X43.1 Q1X43.2 Q2X43.2 Q3X43.2 Q4X43.2
VCCX44: CON1X44.1 Q1X44.2 Q2X44.2 Q3X44.2 Q4X44.2
VCCX45: CON1X45.1 Q1X45.2 Q2X45.2 Q3X45.2 Q4X45.2
VCCX51: CON1X51.1 Q1X51.2 Q2X51.2 Q3X51.2 Q4X51.2
VCCX52: CON1X52.1 Q1X52.2 Q2X52.2 Q3X52.2 Q4X52.2
VCCX53: CON1X53.1 Q1X53.2 Q2X53.2 Q3X53.2 Q4X53.2
VCCX54: CON1X54.1 Q1X54.2 Q2X54.2 Q3X54.2 Q4X54.2
VCCX55: CON1X55.1 Q1X55.2 Q2X55.2 Q3X55.2 Q4X55.2